# Altium PCB Boost_regulator.PcbDoc
Units mil, origin at the board's own origin, x right, y up, seen from the top; angles counter-clockwise.
Board outline 2360 x 870 mil, 2 copper layers (Top Layer, Bottom Layer); 12 components, 7 nets, 28 pads, 4 vias.
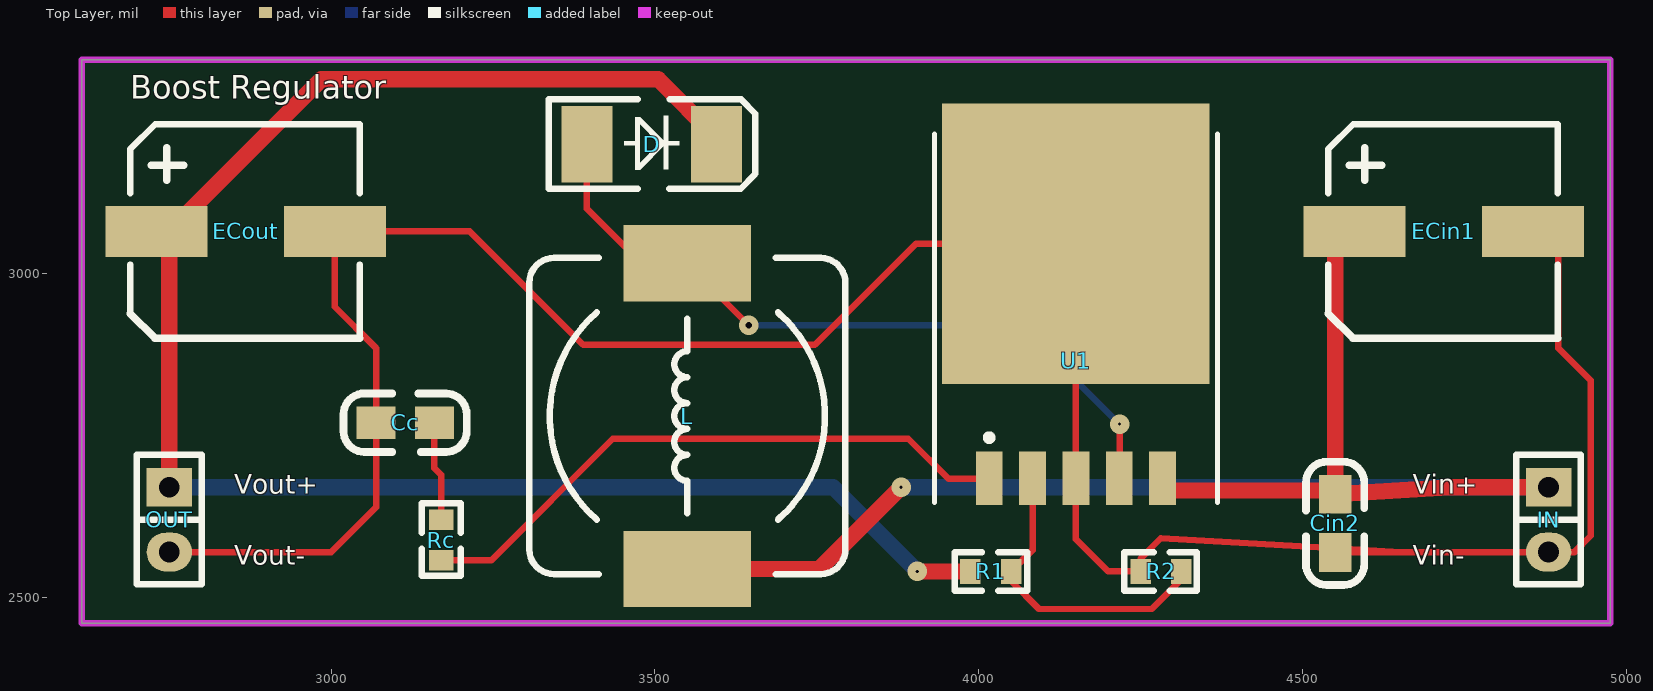
[diagram p0: Top Layer view]
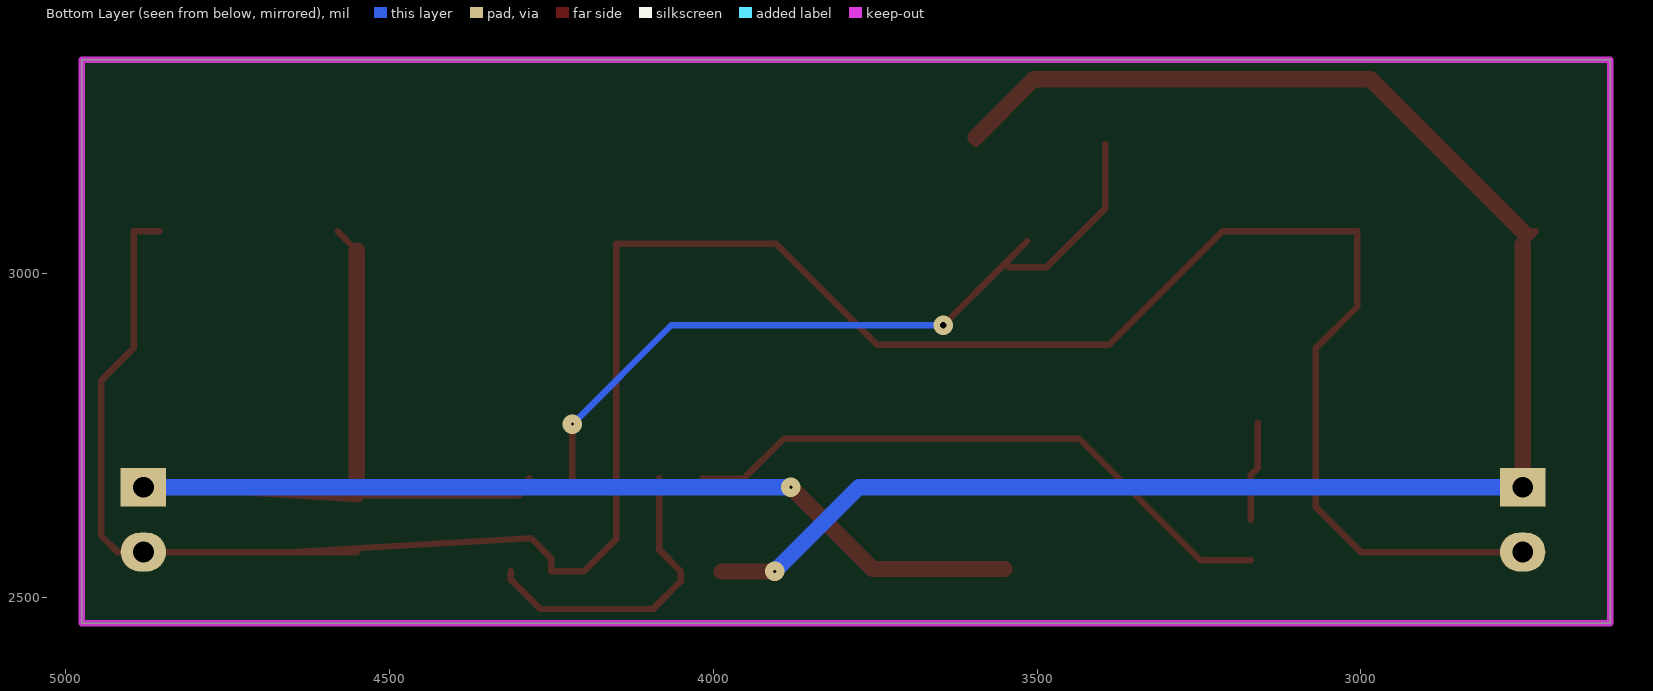
[diagram p1: Bottom Layer view, seen from below]
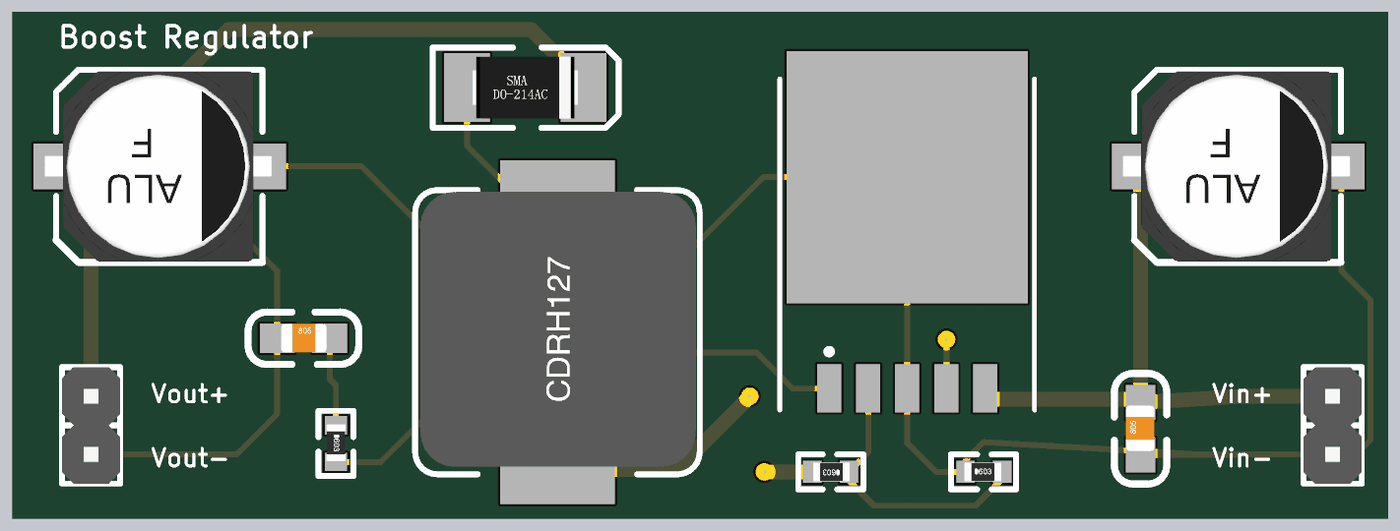
[diagram p2: 3D render of the assembled board from above, using the file's embedded part models]

## Layer stack, top to bottom
Top Solder: solder mask 0.4, Solder Resist, Dk 3.5
Top Layer: signal copper 1.4
Dielectric 1: dielectric 12.6, FR-4, Dk 4.8
Bottom Layer: signal copper 1.4
Bottom Solder: solder mask 0.4, Solder Resist, Dk 3.5

## Board outline
2615,2460 2615,3330 4975,3330 4975,2460

## Design rules (kind name [scope] priority, off if disabled: settings)
Clearance [All] p1: gap=10
PolygonConnect [All] p1: connectstyle=Relief reliefconductorwidth=10 reliefentries=4 polygonreliefangle="90 Angle" airgapwidth=10
RoomDefinition Boost_regulator [InComponentClass('Boost_regulator')] p1: confinementstyle=ConfineIn formatcopy=TRUE lockcomponents=FALSE outline 2610,2455 4980,2455 4980,3335 2610,3335
RoutingVias [All] p1: holewidth=28 width=50 viastyle="Through Hole" minholewidth=28 minwidth=50 maxholewidth=28 maxwidth=50
SolderMaskExpansion [All] p1: expansion=4
Width [All] p1: maxlimit=30 minlimit=10 preferedwidth=10
30 further rules are at their usual default settings.

## Components (designator, comment, footprint, x,y, rotation, side; value= is the part's Value field where it differs from the comment)
Cc "CAP0.47uF" 0805C 3070,2770 r0 top
Cin2 "CAP 0.1uF" 0805C 4550,2570 r90 top
D "DIODE SCHOTTKY 1N5820" SMA/DO-214AC 3400,3200 r0 top
ECin1 "SMD_ECAP  100uF   25V" SMD-EC8X8X10 4850,3070 r0 top
ECout "SMD_ECAP  680uF    16V" SMD-EC8X8X10 3000,3070 r0 top
IN "Pin HDR1X2" "Pin HDR1X2/2.54mm-S" 4880,2670 r0 top
L "INDUCTOR  15uH Renco RL-54725D" CDRH127 3550,2780 r90 top
OUT "Pin HDR1X2" "Pin HDR1X2/2.54mm-S" 2750,2670 r0 top
R1 "RES 48.7k" 0603R 4050,2540 r180 top
R2 "RES  5.62k" 0603R 4250,2540 r0 top
Rc "RES 2k" 0603R 3170,2620 r270 top
U1 "LM2587S-ADJ" TO-263-5 4150,2850 r0 top

## Footprints (in the part's own frame and the unit in brackets; to place one, negate y for a bottom-side part, rotate by r counter-clockwise, add the part's x,y. Pads: shape width x height; smd on the part's side, far side on the other; paste and mask are expansions set on the pad)
0603R [mm]
  rect 0.8x0.965 smd: 1(0,0) 2(1.6,0)
  silkscreen extent -0.64,-0.76 2.21,0.76, body extent -0.04,-0.41 1.56,0.41, height 0.45
0805C [mil]
  rect 60x50 smd: 1(-0.71,-0.4) 2(89.29,-0.4)
  silkscreen extent -51,-45 139,45, body extent 6,-25 84,25, height 31
CDRH127 [mm] "12*12*8mm（长宽高）"
  rect 3x5 smd: 1(-6,0) 2(6,0)
  silkscreen extent -6.2,-6.2 6.2,6.2, body extent -5.87,-6.03 6.13,5.97, height 7.8
"Pin HDR1X2/2.54mm-S" [mil]
  rect 70x60 hole 32: 1(0,0)
  oval 70x60 hole 32: 2(0,-100)
  silkscreen extent -50,-150 50,50, body extent -50,-150 50,50, height 336
SMA/DO-214AC [mm] "塑封二极管"
  rect 2x3 smd: A(-0.127,0) K(4.953,0)
  silkscreen extent -1.63,-1.75 6.48,1.75, body extent 0.11,-1.35 4.71,1.35, height 2.4
SMD-EC8X8X10 [mm]
  rect 4x2 smd: 1(-6.858,-0.127) 2(0.142,-0.127)
  silkscreen extent -7.88,-4.32 1.12,4.08, body extent -8.38,-4.28 1.52,4.02, height 10.2
TO-263-5 [mm] "贴片LM2596"
  rect 1.05x2.1 smd: 1(-3.4,-4.225) 2(-1.7,-4.225) 3(0,-4.225) 4(1.7,-4.225) 5(3.4,-4.225)
  rect 10.5x11 smd: 6(0,4.987)
  silkscreen extent -5.55,-5.17 5.55,9.28, body extent -5.33,-4.7 5.33,10.29, height 3

## Part data
Cc Cin2: library part CAP, "无极性电容"
D: library part "DIODE SCHOTTKY", "肖特基二极管"
ECin1 ECout: library part SMD_ECAP, "贴片电解电容"
L: library part INDUCTOR, "INDUCTOR"
R1 R2 Rc: library part RES
U1: library part LM2577S-ADJ, "DC升压"

## Via types
v1: diameter 30, hole 5, Top Layer to Bottom Layer, 3 vias
v2: diameter 30, hole 10, Top Layer to Bottom Layer, 1 vias

## Nets (pads, with @x,y where several pads share a name; then routed paths per layer and width w, separated by ;. In a path a pad name is that pad's centre, name@x,y a point inside that pad or via, vN(x,y) a via of type N, cw(c..) or ccw(c..) an arc to the next point about the centre after c; other vN are vias at no path point)
GND: Cc.1 Cin2.1 ECin1.2 ECout.2 IN.2 OUT.2 R2.1 U1.3 U1.6 | length 4092.4
  Top Layer w10: OUT.2 3000,2570 3069.29,2639.29 Cc.1 3069.29,2885 3005.59,2948.7 ECout.2 3214,3065 3389,2890 3747,2890 3903.34,3046.34 U1.6 U1.3 4150,2590 4200,2540 R2.1 4250,2560 4281.22,2591.22 4550.77,2575.81 4652.5,2570 4714.71,2570 ; Cin2.1 4714,2569.29 4714.71,2570 ; ECin1.2 4895,3065 4895,2885 4945,2835 4945,2595 4920,2570 IN.2 4714.71,2570
NetCc_2: Cc.2 Rc.1 | length 154
  Top Layer w10: Cc.2 3159.29,2699.71 3170,2689 Rc.1
NetD_A: D.A L.2 U1.4 | length 1198.4
  Top Layer w10: D.A 3395,3100 3485,3010 3543.78,3010 L.2@3549.39,3015.61 ; L.2@3515,3050 L.2@3549.39,3015.61 ; L.2 L.2@3549.39,3015.61 ; v2(3645,2920) L.2@3549.39,3015.61 ; U1.4 4217.5,2684.23 v1(4217.5,2767.5)
  Bottom Layer w10: v2(3645,2920) 4065,2920 v1(4217.5,2767.5)
NetR1_1: R1.1 R2.2 U1.2 | length 484.2
  Top Layer w10: U1.2 4083.07,2573.07 R1.1 4050,2525 4092.99,2482.01 4267.01,2482.01 4312.99,2527.99 R2.2
NetRc_2: Rc.2 U1.1 | length 950.4
  Top Layer w10: Rc.2 3247.01,2557.01 3435,2745 3891.29,2745 3953.29,2683 4016.14,2683 U1.1
VIN: Cin2.2 ECin1.1 IN.1 L.1 U1.5 | length 2406.8
  Top Layer w10: U1.5 U1.5@4302.52,2665 ; ECin1.1@4550.4,3035.4 ECin1.1
  Top Layer w25: L.1 3753.78,2543.78 v1(3880,2670) ; U1.5@4302.52,2665 4544.69,2665 Cin2.2 ; ECin1.1@4550.4,3035.4 Cin2.2 ; IN.1 4726.71,2670 Cin2.2
  Bottom Layer w25: v1(3880,2670) IN.1
VOUT: D.K ECout.1 OUT.1 R1.2 | length 2703.8
  Top Layer w10: ECout.1@2750,3045 ECout.1 ECout.1@2750,3065 ; D.K D.K@3595,3210
  Top Layer w25: OUT.1 ECout.1@2750,3045 ; ECout.1@2750,3065 2985,3300 3505,3300 D.K@3595,3210 ; v1(3905,2540) R1.2
  Bottom Layer w25: OUT.1 3775,2670 v1(3905,2540)

## Keep-outs
Keep-Out Layer:
  the board outline again, w10

## Silkscreen, mask and mechanical layers (free items; w line width, h text height)
Top Overlay:
  text "Boost Regulator" at 2690,3270 h36
  text "Vout+" at 2850,2660 h30
  text "Vin+" at 4670,2660 h30
  text "Vout-" at 2850,2550 h30
  text "Vin-" at 4670,2550 h30